# Altium PCB PCB1.pcbdoc (part 1 of 4)
Units mil, origin at the board's own origin, x right, y up, seen from the top; angles counter-clockwise.
Board outline 3346.69 x 4227.01 mil, 4 copper layers (Top Layer, Inner1, Inner2, Bottom Layer); 103 components, 144 nets, 660 pads, 262 vias.
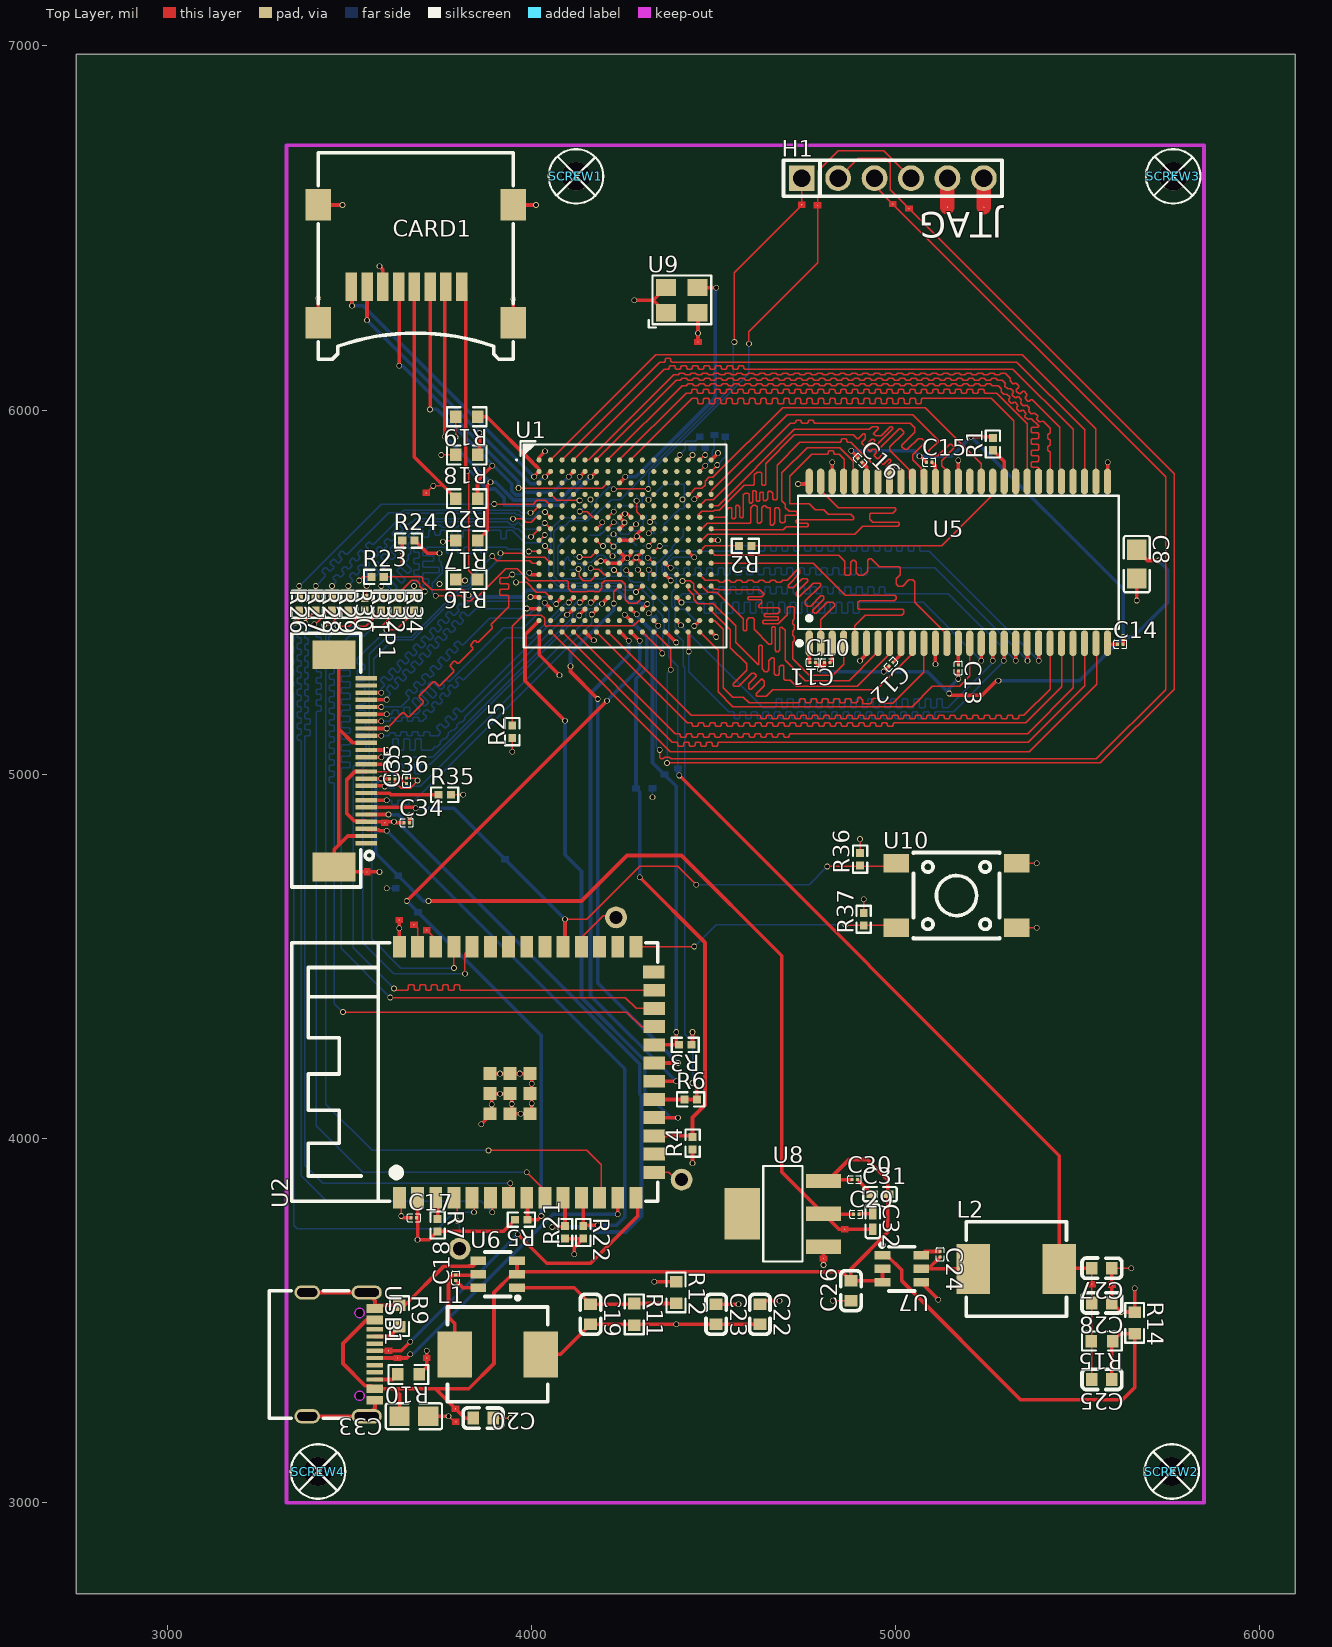
[diagram p0: Top Layer view]
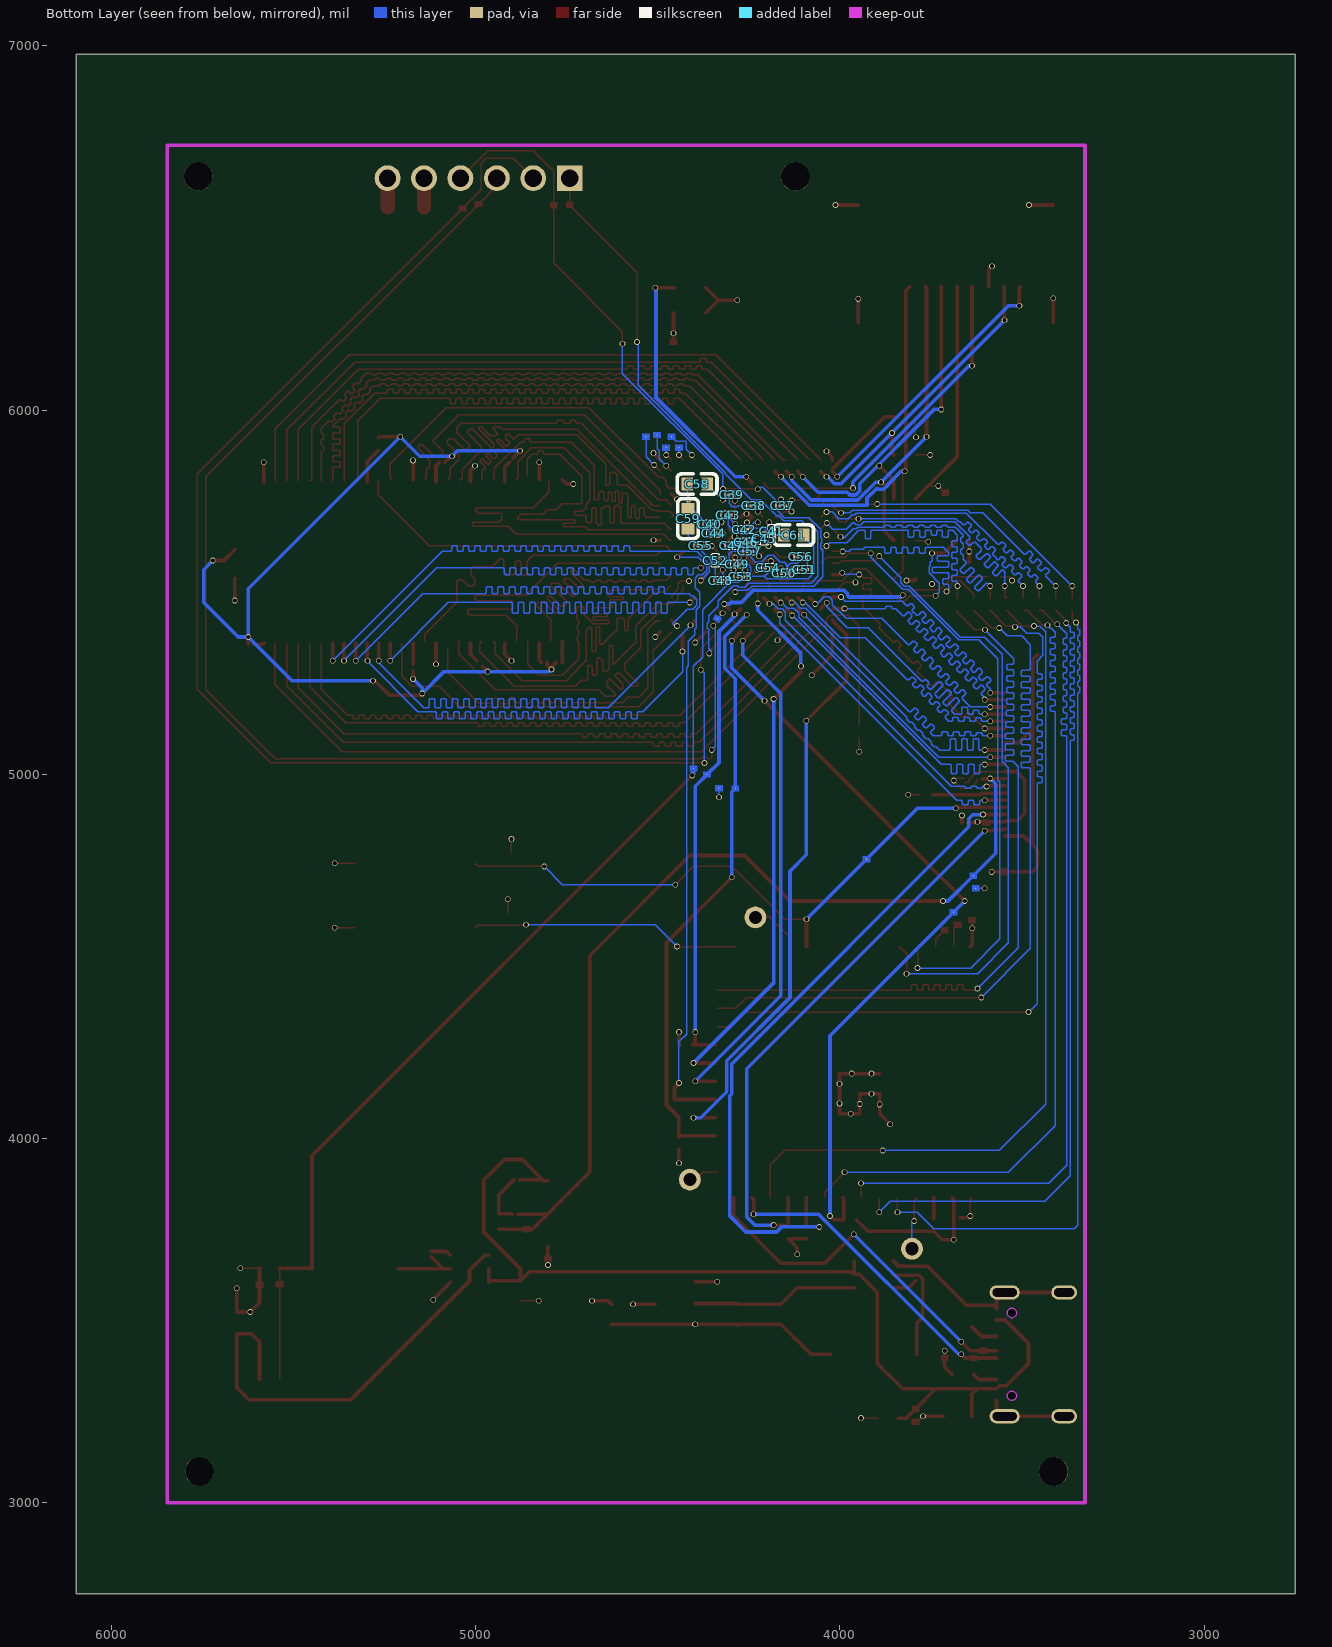
[diagram p1: Bottom Layer view, seen from below]
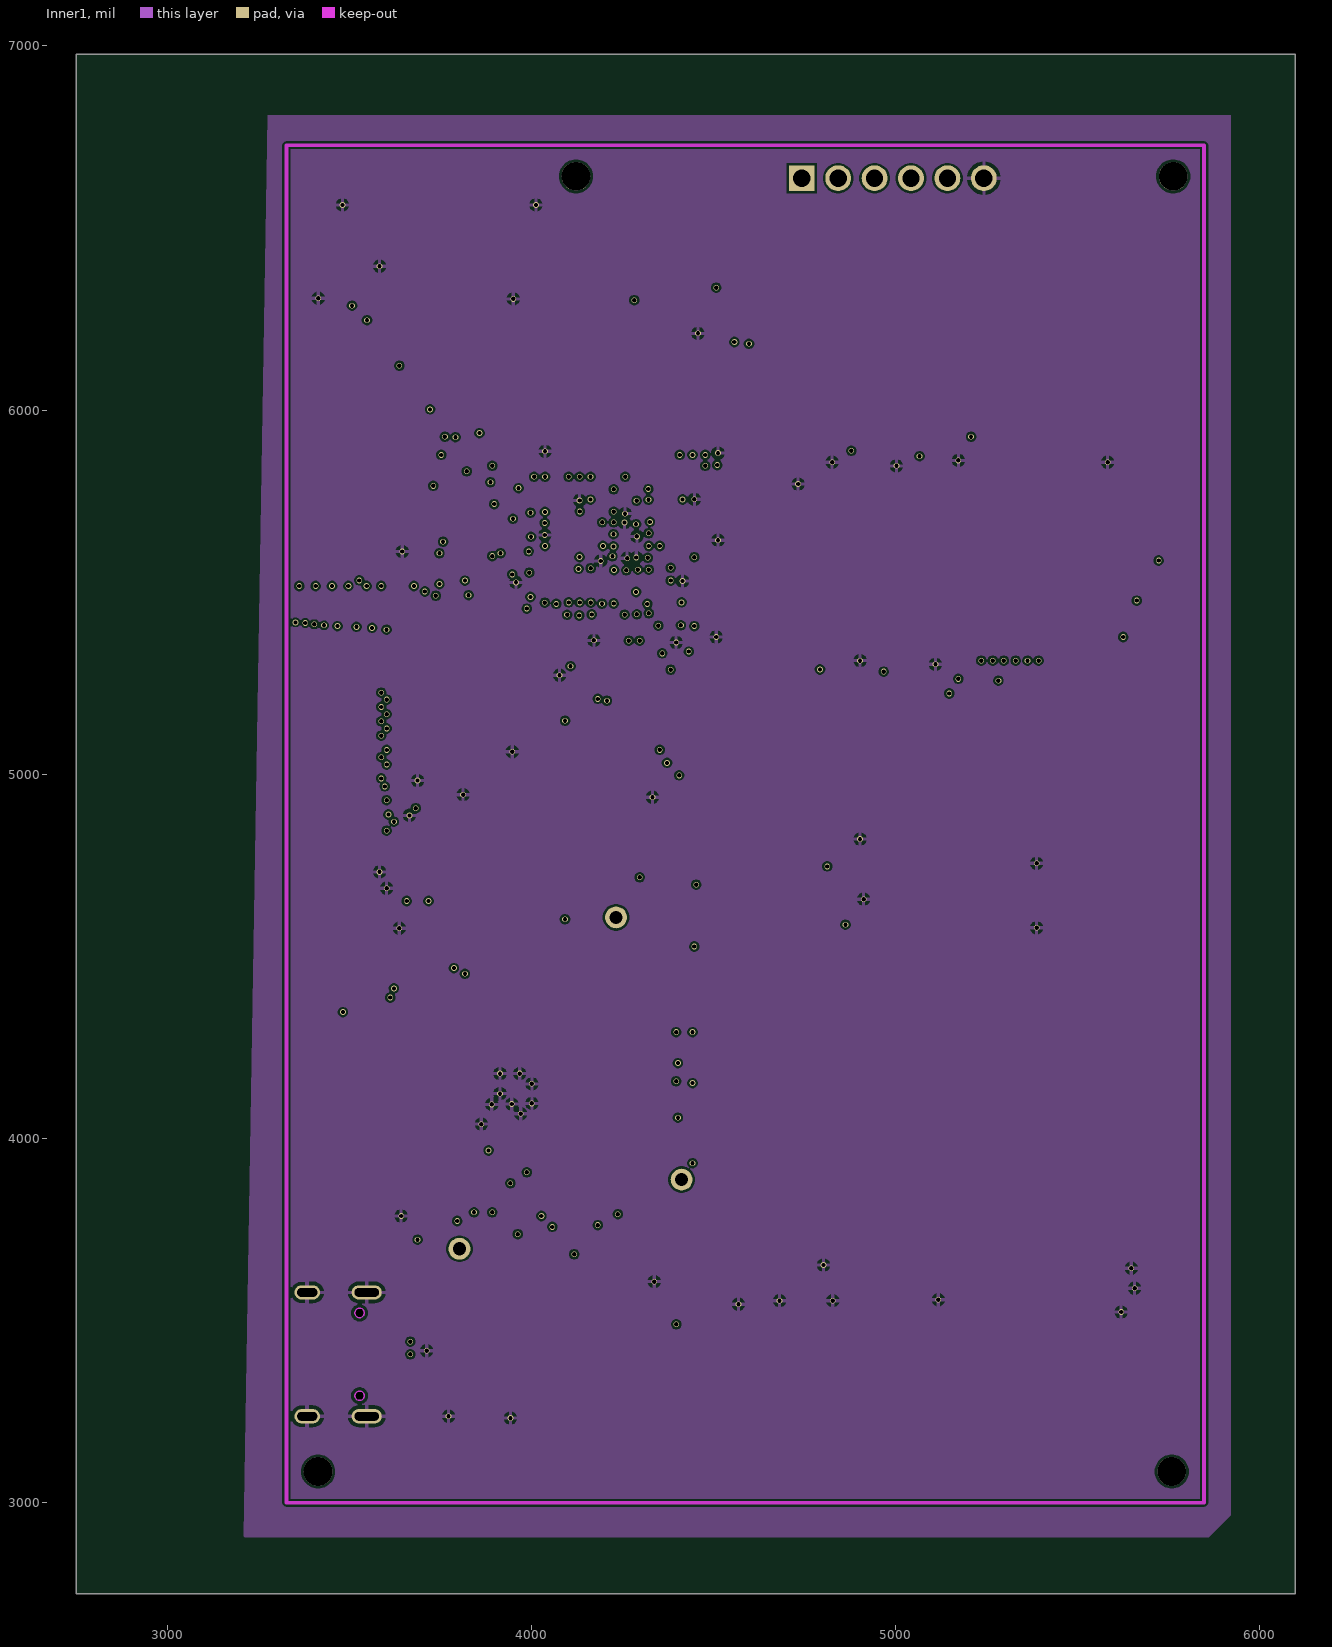
[diagram p2: Inner1]
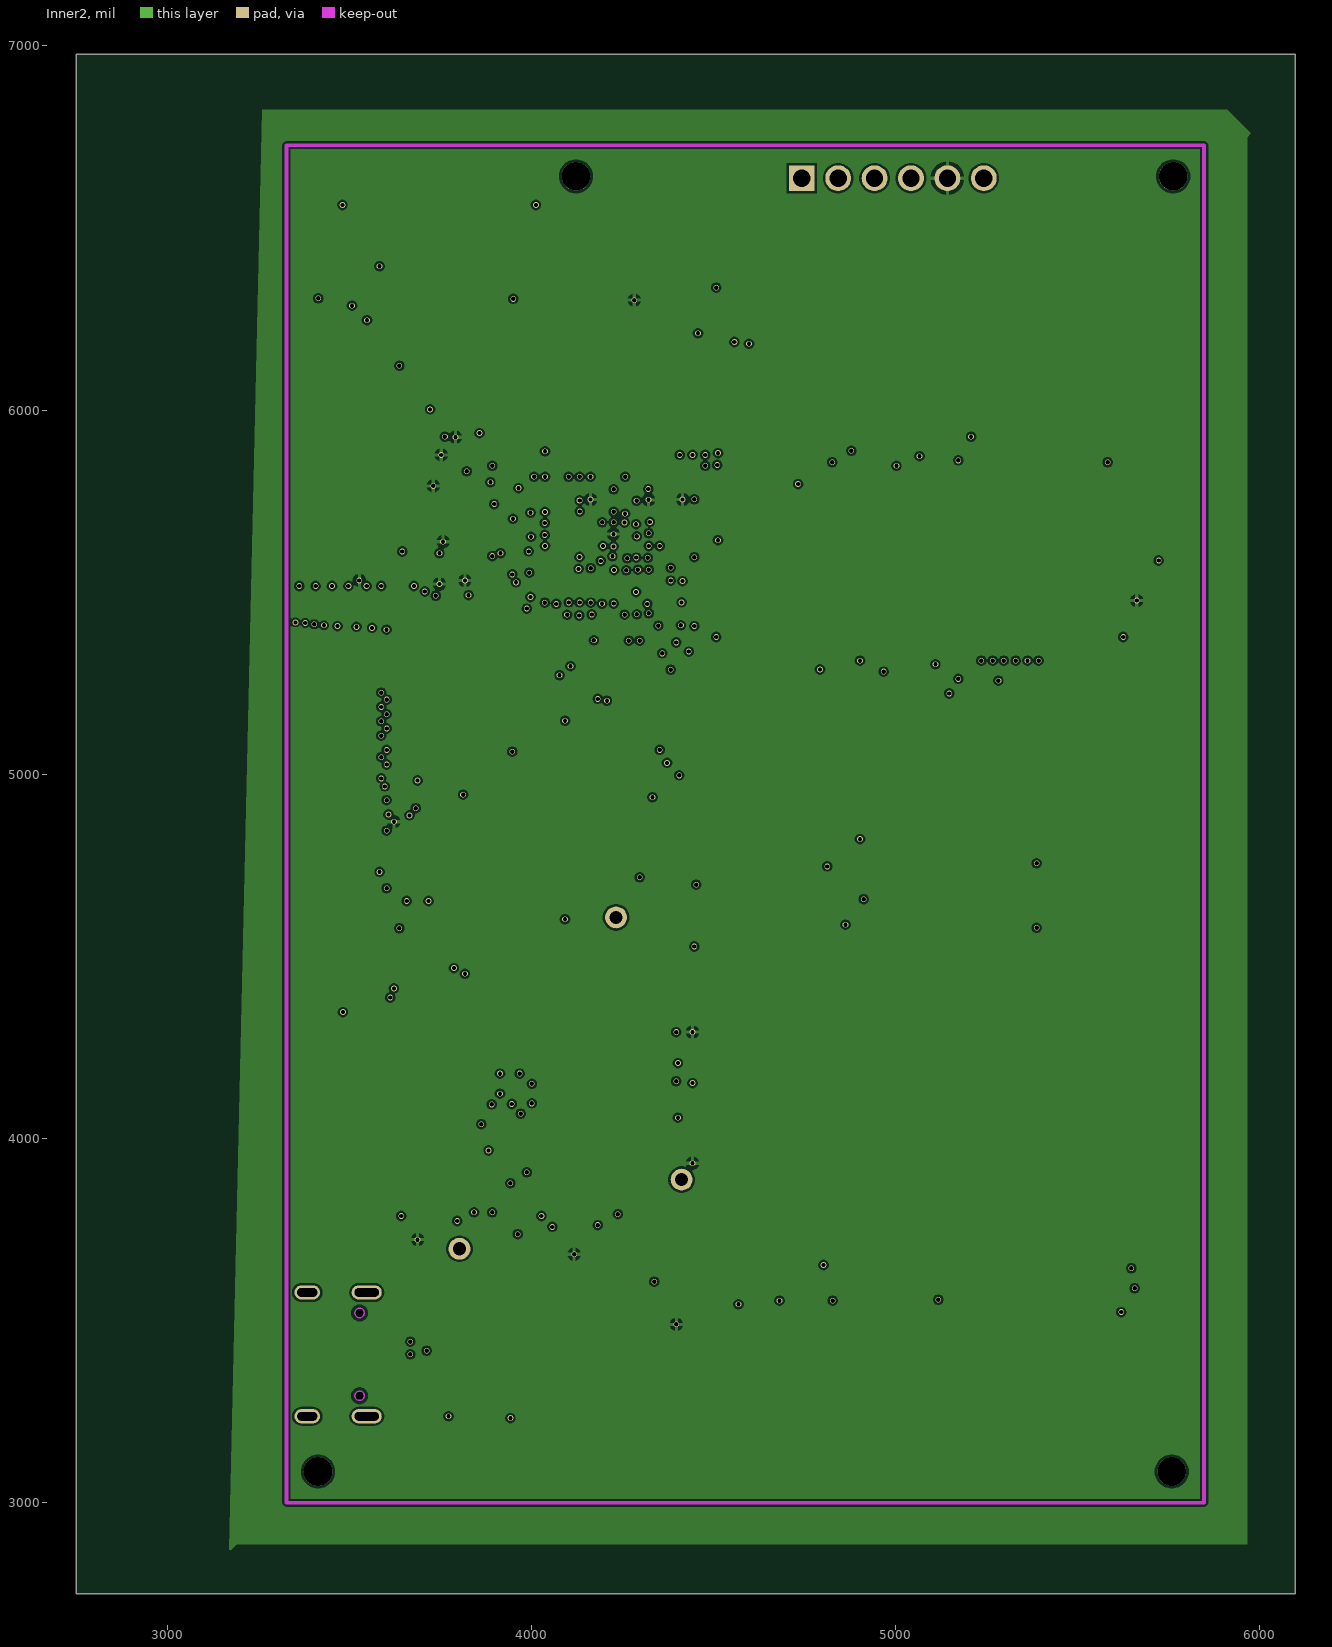
[diagram p3: Inner2]

## Layer stack, top to bottom
Top Solder Mask Layer: solder mask 0.4, Solder Resist, Dk 3.5
Top Layer: signal copper 1.4
Dielectric1: dielectric 12.6, FR-4, Dk 4.8
Inner1: signal copper 1.4
Dielectric5: dielectric 12.6, FR-4, Dk 4.8
Inner2: signal copper 1.4
Dielectric6: dielectric 12.6, FR-4, Dk 4.8
Bottom Layer: signal copper 1.4
Bottom Solder Mask Layer: solder mask 0.4, Solder Resist, Dk 3.5

## Board outline
6096.69,2750 2750,2750 2750,6977.01 6096.69,6977.01

## Design rules (kind name [scope] priority, off if disabled: settings)
BoardOutlineClearance copperThickness1oz_1 [All] p1: gap=10 ignorepadtopadclearanceinfootprint=FALSE except(0: Arc-SplitContinuation Track-SplitContinuation SMDPad-SplitContinuation THPad-SplitContinuation Via-SplitContinuation Fill-SplitContinuation Poly-SplitContinuation Region-SplitContinuation Text-SplitContinuation; 6: Track-CutoutEdge SMDPad-CutoutEdge THPad-CutoutEdge Via-CutoutEdge Region-CutoutEdge; 11.8: Track-OutlineEdge SMDPad-OutlineEdge THPad-OutlineEdge Via-OutlineEdge Fill-OutlineEdge Fill-CutoutEdge Poly-OutlineEdge Region-OutlineEdge Text-OutlineEdge)
BoardOutlineClearance copperThickness2oz_1 [All] p2: gap=10 ignorepadtopadclearanceinfootprint=FALSE except(0: Arc-SplitContinuation Track-SplitContinuation SMDPad-SplitContinuation THPad-SplitContinuation Via-SplitContinuation Fill-SplitContinuation Poly-SplitContinuation Region-SplitContinuation Text-SplitContinuation; 6: Track-CutoutEdge SMDPad-CutoutEdge THPad-CutoutEdge Via-CutoutEdge Region-CutoutEdge; 11.8: Track-OutlineEdge SMDPad-OutlineEdge THPad-OutlineEdge Via-OutlineEdge Fill-OutlineEdge Fill-CutoutEdge Poly-OutlineEdge Region-OutlineEdge Text-OutlineEdge)
Clearance copperThickness1oz [(InNet('SD_A0') OR InNet('SD_A1') OR InNet('SD_A2') OR InNet('SD_A3') OR InNet('SD_A4') OR InNet('SD_A5') OR InNet('SD_A6') OR InNet('SD_A7') OR InNet('SD_A8') OR InNet('SD_A9') OR InNet('SD_A10') OR InNet('SD_A11') OR InNet('SD_A12') OR InNet('SD_DQ15') OR InNet('SD_DQ14') OR InNet('SD_DQ8') OR InNet('SD_BA0') OR InNet('SD_BA1') OR InNet('SD_DQ9') OR InNet('SD_DQ7') OR InNet('SD_CLK') OR InNet('SD_WE_N') OR InNet('SD_DQ10') OR InNet('SD_CAS_N') OR InNet('SD_DQM1') OR InNet('SD_DQ2') OR InNet('SD_DQ3') OR InNet('SD_DQ11') OR InNet('SD_DQ12') OR InNet('SD_DQ13') OR InNet('SD_DQ0') OR InNet('SD_DQ1') OR InNet('SD_CS_N') OR InNet('SD_RAS_N') OR InNet('SD_DQ4') OR InNet('SD_DQ6') OR InNet('$1N9241') OR InNet('$1N9192') OR InNet('GND') OR InNet('$1N9142') OR InNet('SD_DQ5') OR InNet('$1N9091') OR InNet('SD_DQM0') OR InNet('$1N9039') OR InNet('$1N8986') OR InNet('$1N8318') OR InNet('$1N9437') OR InNet('$1N9341') OR InNet('+3V3') OR InNet('$1N11348') OR InNet('DOUT') OR InNet('DIN') OR InNet('CCLK') OR InNet('DONE') OR InNet('PROGRAMN') OR InNet('INITN') OR InNet('$1N11975') OR InNet('DN') OR InNet('DP') OR InNet('$1N14459') OR InNet('$1N14416') OR InNet('$1N14567') OR InNet('+5V') OR InNet('$1N16833') OR InNet('$1N16832') OR InNet('+1V1') OR InNet('$1N16834') OR InNet('+1V8') OR InNet('$1N17349') OR InNet('$1N12557') OR InNet('$1N12553') OR InNet('M_D2') OR InNet('M_D3') OR InNet('M_CMD') OR InNet('M_CLK') OR InNet('M_D0') OR InNet('M_D1') OR InNet('SDA') OR InNet('SCL') OR InNet('RESET') OR InNet('VSYNC') OR InNet('HREF') OR InNet('Y9') OR InNet('MCLK') OR InNet('Y8') OR InNet('Y7') OR InNet('PCLK') OR InNet('Y6') OR InNet('Y2') OR InNet('Y5') OR InNet('Y3') OR InNet('Y4') OR InNet('$1N24422') OR InNet('$1N24377') OR InNet('$1N24492') OR InNet('CRYSTAL') OR InNet('SSPI_CS_N') OR InNet('D0') OR InNet('D1') OR InNet('D2') OR InNet('D4') OR InNet('D3') OR InNet('D5') OR InNet('D6') OR InNet('D7') OR InNet('RX') OR InNet('TX') OR InNet('$1N29790') OR InNet('$1N29833') OR InNet('$1N29916') OR InNet('$1N29959') OR InNet('$1N30002') OR InNet('$1N30085') OR InNet('$1N30089') OR InNet('$1N30093') OR InNet('TDO') OR InNet('TDI') OR InNet('TMS') OR InNet('TCK') OR InNet('$1N33205') OR InNet('PROGRAM') OR InNet('$1N36431') OR InNet('$1N36646') OR InNet('$1N36895') OR InNet('$1N37600') OR InNet('$1N37295') OR InNet('$1N36495') OR InNet('$1N36690') OR InNet('$1N36953') OR InNet('$1N37637') OR InNet('$1N37245') OR InNet('$1N37470') OR InNet('$1N36752') OR InNet('$1N37409') OR InNet('$1N36552') OR InNet('$1N37361') OR InNet('$1N36571') OR InNet('$1N36807') OR InNet('$1N37097') OR InNet('$1N37518') OR InNet('$1N37345') OR InNet('$1N37150') OR InNet('$1N47813') OR InNet('$1N41066'))] p1: gap=6 ignorepadtopadclearanceinfootprint=FALSE except(3.9: Track-Track; 6.9: Track-Hole SMDPad-Hole THPad-Hole Via-Hole Fill-Hole Poly-Hole Region-Hole Text-Hole; 7: Arc-Arc Arc-Track Arc-SMDPad Arc-THPad Arc-Via Arc-Fill Arc-Poly Arc-Region Arc-Text Arc-Hole; 11.8: Track-Fill Fill-Region)
Clearance copperThickness2oz [All] p2: gap=6 ignorepadtopadclearanceinfootprint=FALSE except(6.9: Track-Hole SMDPad-Hole THPad-Hole Via-Hole Fill-Hole Poly-Hole Region-Hole Text-Hole; 7: Arc-Arc Arc-Track Arc-SMDPad Arc-THPad Arc-Via Arc-Fill Arc-Poly Arc-Region Arc-Text Arc-Hole; 8: Track-Track; 11.8: Track-Fill Fill-Region)
DiffPairsRouting differentialPair [All] p1: maxlimit=6 minlimit=6 mostfreqgap=6 toplayer_minwidth=5 toplayer_maxwidth=100 toplayer_prefwidth=10 midlayer1_minwidth=5 midlayer1_maxwidth=100 midlayer1_prefwidth=10 midlayer2_minwidth=5 midlayer2_maxwidth=100 midlayer2_prefwidth=10 bottomlayer_minwidth=5 bottomlayer_maxwidth=100 bottomlayer_prefwidth=10 maxuncoupledlength=10
PasteMaskExpansion pasteMaskExpansion [All] p1: expansion=0
PlaneConnect innerPlane [All] p1: planeconnectstyle=Relief reliefexpansion=20 reliefentries=4 reliefconductorwidth=10 reliefairgap=10
PolygonConnect copperRegion [All] p1: connectstyle=Relief reliefconductorwidth=10 reliefentries=4 polygonreliefangle="90 Angle" airgapwidth=10
RoutingVias viaSize [All] p1: holewidth=11.81 width=15.75 viastyle="Through Hole" minholewidth=11.81 minwidth=15.75 maxholewidth=248.03 maxwidth=393.7
SolderMaskExpansion solderMaskExpansion [All] p1: expansion=2 istentingtop=FALSE useseparateexpansions=TRUE expansionbottom=2 istentingbottom=FALSE
Width copperThickness1oz_2 [All] p1: maxlimit=100 minlimit=4 preferedwidth=4
Width copperThickness2oz_2 [All] p2: maxlimit=100 minlimit=8 preferedwidth=10
27 further rules are at their usual default settings.

## Components (designator, comment, footprint, x,y, rotation, side; value= is the part's Value field where it differs from the comment)
C8 "CL21A476MQYNNNE" C0805 5662.01,5577.01 r270 top
C10 "GRM022R60J104KE15D" C01005 4772.01,5307.01 r0 top
C11 "GRM022R60J104KE15D" C01005 4812.01,5307.01 r180 top
C12 "GRM022R60J104KE15D" C01005 4987.01,5302.01 r225 top
C13 "GRM022R60J104KE15D" C01005 5172.01,5292.01 r270 top
C14 "GRM022R60J104KE15D" C01005 5617.01,5357.01 r0 top
C15 "GRM022R60J104KE15D" C01005 5092.01,5857.01 r0 top
C16 "GRM022R60J104KE15D" C01005 4902.01,5862.01 r315 top
C17 "GRM022R60J104KE15D" C01005 3677.01,3782.01 r0 top
C18 "GRM022R60J104KE15D" C01005 3792.01,3617.01 r90 top
C19 "TCC0603X7R104K500CT" C0603 4162.01,3517.01 r270 top
C20 "TCC0603X5R226M6R3CT" C0603 3867.01,3232.01 r180 top
C22 "TCC0603X5R226M6R3CT" C0603 4627.01,3517.01 r270 top
C23 "TCC0603X5R226M6R3CT" C0603 4507.01,3517.01 r270 top
C24 "GRM022R60J104KE15D" C01005 5122.01,3682.01 r270 top
C25 "TCC0603X7R104K500CT" C0603 5566.19,3338.55 r180 top
C26 "TCC0603X5R226M6R3CT" C0603 4877.01,3582.01 r90 top
C27 "TCC0603X5R226M6R3CT" C0603 5566.19,3643.55 r180 top
C28 "TCC0603X5R226M6R3CT" C0603 5566.19,3548.55 r180 top
C29 "GRM022R60J104KE15D" C01005 4892.01,3792.01 r0 top
C30 "GRM022R60J104KE15D" C01005 4887.01,3887.01 r0 top
C31 "GRM155R60J106ME44D" C0402 4957.01,3847.01 r0 top
C32 "GRM155R60J106ME44D" C0402 4937.01,3772.01 r270 top
C33 "CL21A476MQYNNNE" C0805 3677.01,3237.01 r180 top
C34 "GRM022R60J104KE15D" C01005 3657.01,4867.01 r0 top
C35 "GRM022R60J104KE15D" C01005 3657.01,4982.01 r90 top
C36 "GRM022R60J104KE15D" C01005 3617.01,4987.01 r0 top
C37 "GRM022R60J104KE15D" C01005 4157.01,5737.01 r180 bottom
C38 "GRM022R60J104KE15D" C01005 4237.01,5737.01 r180 bottom
C39 "GRM022R60J104KE15D" C01005 4297.01,5767.01 r180 bottom
C40 "GRM022R60J104KE15D" C01005 4357.01,5687.01 r180 bottom
C41 "GRM022R60J104KE15D" C01005 4187.01,5667.01 r90 bottom
C42 "GRM022R60J104KE15D" C01005 4262.01,5672.01 r180 bottom
C43 "GRM022R60J104KE15D" C01005 4307.01,5712.01 r180 bottom
C44 "GRM022R60J104KE15D" C01005 4347.01,5662.01 r180 bottom
C45 "GRM022R60J104KE15D" C01005 4207.01,5647.01 r270 bottom
C46 "GRM022R60J104KE15D" C01005 4257.01,5637.01 r180 bottom
C47 "GRM022R60J104KE15D" C01005 4297.01,5627.01 r0 bottom
C48 "GRM022R60J104KE15D" C01005 4327.01,5532.01 r0 bottom
C49 "GRM022R60J104KE15D" C01005 4282.01,5577.01 r180 bottom
C50 "GRM022R60J104KE15D" C01005 4153.01,5552.01 r180 bottom
C51 "GRM022R60J104KE15D" C01005 4097.01,5562.01 r180 bottom
C52 "GRM022R60J104KE15D" C01005 4342.01,5587.01 r270 bottom
C53 "GRM022R60J104KE15D" C01005 4272.01,5542.01 r180 bottom
C54 "GRM022R60J104KE15D" C01005 4197.01,5567.01 r180 bottom
C55 "GRM022R60J104KE15D" C01005 4382.01,5627.01 r0 bottom
C56 "GRM022R60J104KE15D" C01005 4107.01,5597.01 r180 bottom
C57 "GRM022R60J104KE15D" C01005 4247.01,5612.01 r0 bottom
C58 "TCC0603X5R226M6R3CT" C0603 4392.01,5797.01 r180 bottom
C59 "TCC0603X5R226M6R3CT" C0603 4417.01,5702.01 r90 bottom
C61 "TCC0603X5R226M6R3CT" C0603 4127.01,5657.01 r180 bottom
CARD1 "DS1139-06-08SS4BSR" TF-SMD_DS1139-06-08SS4BSR 3682.01,6402.01 r0 top
H1 "2.54-1x6P直针" HDR-TH_6P-P2.54-V-M-1 4992.01,6637.01 r0 top
L1 "FXL0630-6R8-M" IND-SMD_L7.0-W6.6 3907.01,3407.01 r0 top
L2 "FXL0630-100-M" IND-SMD_L7.3-W6.8 5331.37,3641.78 r0 top
P1 "AFC07-S24FCC-00" FPC-SMD_AFC07-S24FCC-00 3502.01,5037.01 r270 top
R1 "0402WGF1002TCE" R0402 5267.01,5907.01 r90 top
R2 "0402WGF330JTCE" R0402 4587.01,5627.01 r180 top
R3 "0402WGF1002TCE" R0402 4422.01,4257.01 r180 top
R4 "0402WGF1002TCE" R0402 4442.01,3987.01 r90 top
R5 "0402WGF1002TCE" R0402 3972.01,3777.01 r180 top
R6 "0402WGF330JTCE" R0402 4437.01,4107.01 r0 top
R7 "0402WGF1002TCE" R0402 3742.01,3762.01 r270 top
R9 "0603WAF5101T5E" R0603 3637.01,3512.01 r270 top
R10 "0603WAF5101T5E" R0603 3662.01,3352.01 r180 top
R11 "FRC0603F1963TS" R0603 4282.01,3517.01 r270 top
R12 "FRC0603F6202TS" R0603 4397.01,3577.01 r270 top
R14 "FRC0603F6202TS" R0603 5656.19,3493.55 r270 top
R15 "0603WAF2322T5E" R0603 5566.19,3443.55 r180 top
R16 "FRC0603F6202TS" R0603 3821.85,5534.98 r180 top
R17 "FRC0603F6202TS" R0603 3822.01,5642.01 r180 top
R18 "FRC0603F6202TS" R0603 3822.01,5877.01 r180 top
R19 "FRC0603F6202TS" R0603 3822.01,5982.01 r180 top
R20 "FRC0603F6202TS" R0603 3822.01,5757.01 r180 top
R21 "0402WGF1002TCE" R0402 4092.01,3742.01 r270 top
R22 "0402WGF1002TCE" R0402 4142.01,3742.01 r270 top
R23 "0402WGF1002TCE" R0402 3577.01,5542.01 r0 top
R24 "0402WGF1002TCE" R0402 3662.01,5642.01 r0 top
R25 "0402WGF1002TCE" R0402 3947.01,5117.01 r90 top
R26 "0402WGF330JTCE" R0402 3362.01,5467.01 r270 top
R27 "0402WGF330JTCE" R0402 3407.01,5467.01 r270 top
R28 "0402WGF330JTCE" R0402 3452.01,5467.01 r270 top
R29 "0402WGF330JTCE" R0402 3497.01,5467.01 r270 top
R30 "0402WGF330JTCE" R0402 3542.01,5467.01 r270 top
R31 "0402WGF330JTCE" R0402 3587.01,5467.01 r270 top
R32 "0402WGF330JTCE" R0402 3632.01,5467.01 r270 top
R34 "0402WGF330JTCE" R0402 3677.01,5467.01 r270 top
R35 "0402WGF1002TCE" R0402 3761.46,4943.95 r0 top
R36 "0402WGF1002TCE" R0402 4902.01,4767.01 r90 top
R37 "0402WGF1002TCE" R0402 4912.01,4602.01 r90 top
SCREW1 "Screw-Hole-M2" Screw-Hole-M2 4122.01,6642.01 r0 top
SCREW2 "Screw-Hole-M2" Screw-Hole-M2 5758.09,3085.35 r0 top
SCREW3 "Screw-Hole-M2" Screw-Hole-M2 5762.01,6642.01 r0 top
SCREW4 "Screw-Hole-M2" Screw-Hole-M2 3413.66,3085.35 r0 top
U1 "LFE5U-25F-6BG256C" CABGA-256_L14.0-W14.0-R16-C16-P0.80-TL 4257.01,5627.01 r0 top
U2 "ESP32-S3-WROOM-1-N16R2" WIRELM-SMD_ESP32-S3-WROOM-1 3987.01,4182.01 r90 top
U5 "W9825G6KH-6" TSOP-54_L22.2-W10.2-P0.80-LS11.8-BL 5172.01,5582.01 r0 top
U6 "AP63200WU-7" SOT-23-6_L2.9-W1.6-P0.95-LS2.8-BR 3907.01,3627.01 r0 top
U7 "AP63200WU-7" SOT-23-6_L2.9-W1.6-P0.95-LS2.8-BR 5017.01,3642.01 r180 top
U8 "AMS1117-1.8_C6185" SOT-223-4_L6.5-W3.5-P2.30-LS7.0-BR 4690.15,3793.15 r0 top
U9 "XOS32024000LT00351005" OSC-SMD_4P-L3.2-W2.5-BL 4412.01,6302.01 r0 top
U10 "TPS645-5NC60" SW-SMD_4P-L6.0-W6.0-P4.50-LS9.2 5167.01,4667.01 r0 top
USB1 "TYPE-C16PIN" USB-C-SMD_TYPE-C16PIN 3477.01,3407.01 r270 top

## Footprints (in the part's own frame and the unit in brackets; to place one, negate y for a bottom-side part, rotate by r counter-clockwise, add the part's x,y. Pads: shape width x height; smd on the part's side, far side on the other; paste and mask are expansions set on the pad)
C0402 [mm]
  rect 0.79x0.54 smd paste-100 mask+0.051: 1(-0.545,0) 2(0.545,0)
  silkscreen extent -1.17,-0.5 1.17,0.5
C0603 [mm]
  rect 0.8x0.9 smd: 1(-0.7,0) 2(0.7,0)
  silkscreen extent -1.39,-0.71 1.39,0.71
C0805 [mm]
  rect 1.41x1.35 smd paste-100 mask+0.051: 1(-1,0) 2(1,0)
  silkscreen extent -1.96,-0.9 1.96,0.9
C01005 [mm]
  rect 0.21x0.22 smd: 1(-0.195,0) 2(0.195,0)
  silkscreen extent -0.46,-0.27 0.46,0.27
CABGA-256_L14.0-W14.0-R16-C16-P0.80-TL [mm]
  round 0.36 smd paste-100 mask+0.051: A1(-6,6) A2(-5.2,6) A3(-4.4,6) A4(-3.6,6) A5(-2.8,6) A6(-2,6) A7(-1.2,6) A8(-0.4,6) A9(0.4,6) A10(1.2,6) A11(2,6) A12(2.8,6) A13(3.6,6) A14(4.4,6) A15(5.2,6) A16(6,6) B1(-6,5.2) B2(-5.2,5.2) B3(-4.4,5.2) B4(-3.6,5.2) B5(-2.8,5.2) B6(-2,5.2) B7(-1.2,5.2) B8(-0.4,5.2) B9(0.4,5.2) B10(1.2,5.2) B11(2,5.2) B12(2.8,5.2) B13(3.6,5.2) B14(4.4,5.2) B15(5.2,5.2) B16(6,5.2) C1(-6,4.4) C2(-5.2,4.4) C3(-4.4,4.4) C4(-3.6,4.4) C5(-2.8,4.4) C6(-2,4.4) C7(-1.2,4.4) C8(-0.4,4.4) C9(0.4,4.4) C10(1.2,4.4) C11(2,4.4) C12(2.8,4.4) C13(3.6,4.4) C14(4.4,4.4) C15(5.2,4.4) C16(6,4.4) D1(-6,3.6) D2(-5.2,3.6) D3(-4.4,3.6) D4(-3.6,3.6) D5(-2.8,3.6) D6(-2,3.6) D7(-1.2,3.6) D8(-0.4,3.6) D9(0.4,3.6) D10(1.2,3.6) D11(2,3.6) D12(2.8,3.6) D13(3.6,3.6) D14(4.4,3.6) D15(5.2,3.6) D16(6,3.6) E1(-6,2.8) E2(-5.2,2.8) E3(-4.4,2.8) E4(-3.6,2.8) E5(-2.8,2.8) E6(-2,2.8) E7(-1.2,2.8) E8(-0.4,2.8) E9(0.4,2.8) E10(1.2,2.8) E11(2,2.8) E12(2.8,2.8) E13(3.6,2.8) E14(4.4,2.8) E15(5.2,2.8) E16(6,2.8) F1(-6,2) F2(-5.2,2) F3(-4.4,2) F4(-3.6,2) F5(-2.8,2) F6(-2,2) F7(-1.2,2) F8(-0.4,2) F9(0.4,2) F10(1.2,2) F11(2,2) F12(2.8,2) F13(3.6,2) F14(4.4,2) F15(5.2,2) F16(6,2) G1(-6,1.2) G2(-5.2,1.2) G3(-4.4,1.2) G4(-3.6,1.2) G5(-2.8,1.2) G6(-2,1.2) G7(-1.2,1.2) G8(-0.4,1.2) G9(0.4,1.2) G10(1.2,1.2) G11(2,1.2) G12(2.8,1.2) G13(3.6,1.2) G14(4.4,1.2) G15(5.2,1.2) G16(6,1.2) H1(-6,0.4) H2(-5.2,0.4) H3(-4.4,0.4) H4(-3.6,0.4) H5(-2.8,0.4) H6(-2,0.4) H7(-1.2,0.4) H8(-0.4,0.4) H9(0.4,0.4) H10(1.2,0.4) H11(2,0.4) H12(2.8,0.4) H13(3.6,0.4) H14(4.4,0.4) H15(5.2,0.4) H16(6,0.4) J1(-6,-0.4) J2(-5.2,-0.4) J3(-4.4,-0.4) J4(-3.6,-0.4) J5(-2.8,-0.4) J6(-2,-0.4) J7(-1.2,-0.4) J8(-0.4,-0.4) J9(0.4,-0.4) J10(1.2,-0.4) J11(2,-0.4) J12(2.8,-0.4) J13(3.6,-0.4) J14(4.4,-0.4) J15(5.2,-0.4) J16(6,-0.4) K1(-6,-1.2) K2(-5.2,-1.2) K3(-4.4,-1.2) K4(-3.6,-1.2) K5(-2.8,-1.2) K6(-2,-1.2) K7(-1.2,-1.2) K8(-0.4,-1.2) K9(0.4,-1.2) K10(1.2,-1.2) K11(2,-1.2) K12(2.8,-1.2) K13(3.6,-1.2) K14(4.4,-1.2) K15(5.2,-1.2) K16(6,-1.2) L1(-6,-2) L2(-5.2,-2) L3(-4.4,-2) L4(-3.6,-2) L5(-2.8,-2) L6(-2,-2) L7(-1.2,-2) L8(-0.4,-2) L9(0.4,-2) L10(1.2,-2) L11(2,-2) L12(2.8,-2) L13(3.6,-2) L14(4.4,-2) L15(5.2,-2) L16(6,-2) M1(-6,-2.8) M2(-5.2,-2.8) M3(-4.4,-2.8) M4(-3.6,-2.8) M5(-2.8,-2.8) M6(-2,-2.8) M7(-1.2,-2.8) M8(-0.4,-2.8) M9(0.4,-2.8) M10(1.2,-2.8) M11(2,-2.8) M12(2.8,-2.8) M13(3.6,-2.8) M14(4.4,-2.8) M15(5.2,-2.8) M16(6,-2.8) N1(-6,-3.6) N2(-5.2,-3.6) N3(-4.4,-3.6) N4(-3.6,-3.6) N5(-2.8,-3.6) N6(-2,-3.6) N7(-1.2,-3.6) N8(-0.4,-3.6) N9(0.4,-3.6) N10(1.2,-3.6) N11(2,-3.6) N12(2.8,-3.6) N13(3.6,-3.6) N14(4.4,-3.6) N15(5.2,-3.6) N16(6,-3.6) P1(-6,-4.4) P2(-5.2,-4.4) P3(-4.4,-4.4) P4(-3.6,-4.4) P5(-2.8,-4.4) P6(-2,-4.4) P7(-1.2,-4.4) P8(-0.4,-4.4) P9(0.4,-4.4) P10(1.2,-4.4) P11(2,-4.4) P12(2.8,-4.4) P13(3.6,-4.4) P14(4.4,-4.4) P15(5.2,-4.4) P16(6,-4.4) R1(-6,-5.2) R2(-5.2,-5.2) R3(-4.4,-5.2) R4(-3.6,-5.2) R5(-2.8,-5.2) R6(-2,-5.2) R7(-1.2,-5.2) R8(-0.4,-5.2) R9(0.4,-5.2) R10(1.2,-5.2) R11(2,-5.2) R12(2.8,-5.2) R13(3.6,-5.2) R14(4.4,-5.2) R15(5.2,-5.2) R16(6,-5.2) T1(-6,-6) T2(-5.2,-6) T3(-4.4,-6) T4(-3.6,-6) T5(-2.8,-6) T6(-2,-6) T7(-1.2,-6) T8(-0.4,-6) T9(0.4,-6) T10(1.2,-6) T11(2,-6) T12(2.8,-6) T13(3.6,-6) T14(4.4,-6) T15(5.2,-6) T16(6,-6)
  silkscreen extent -7.63,-7.08 7.08,7.3
FPC-SMD_AFC07-S24FCC-00 [mm]
  rect 0.3x1.5 smd: 1(5.745,1.129) 2(5.245,1.129) 3(4.746,1.129) 4(4.245,1.129) 5(3.746,1.129) 6(3.245,1.129) 7(2.746,1.129) 8(2.245,1.129) 9(1.746,1.129) 10(1.245,1.129) 11(0.746,1.129) 12(0.245,1.129) 13(-0.254,1.129) 14(-0.755,1.129) 15(-1.251,1.13) 16(-1.754,1.13) 17(-2.254,1.128) 18(-2.754,1.129) 19(-3.254,1.129) 20(-3.756,1.132) 21(-4.256,1.132) 22(-4.756,1.132) 23(-5.256,1.132) 24(-5.756,1.132)
  rect 2x3 smd: 25(-7.401,-1.132) 26(7.401,-1.125)
  silkscreen extent -8.89,-4.07 8.8,1.61
HDR-TH_6P-P2.54-V-M-1 [mm]
  rect 1.8x1.8 hole 1.2: 1(-6.35,0)
  round 1.8 hole 1.2: 2(-3.81,0) 3(-1.27,0) 4(1.27,0) 5(3.81,0) 6(6.35,0)
  silkscreen extent -7.62,-1.25 7.62,1.25
IND-SMD_L7.0-W6.6 [mm]
  rect 2.4x3.2 smd: 1(-3,0) 2(3,0)
  silkscreen extent -3.5,-3.3 3.5,3.3
IND-SMD_L7.3-W6.8 [mm]
  rect 2.35x3.5 smd: 1(-3,0) 2(3,0)
  silkscreen extent -3.5,-3.3 3.5,3.3
OSC-SMD_4P-L3.2-W2.5-BL [mm]
  rect 1.4x1.2 smd: 1(-1.1,-0.875) 2(1.1,-0.875) 3(1.1,0.875) 4(-1.1,0.875)
  silkscreen extent -2.29,-1.9 2.07,1.72
R0402 [mm]
  rect 0.566x0.54 smd paste-100 mask+0.051: 1(-0.433,0) 2(0.433,0)
  silkscreen extent -0.94,-0.5 0.94,0.5
R0603 [mil]
  rect 31.75x34.02 smd paste-3937.01 mask+2: 1(-29.66,0) 2(29.66,0)
  silkscreen extent -55,-26 55,26
Screw-Hole-M2 [mm]
  round 2 hole 2: 1(0,0)
  silkscreen extent -1.9,-1.9 1.9,1.9
SOT-23-6_L2.9-W1.6-P0.95-LS2.8-BR [mm]
  rect 1.1x0.6 smd paste+0 mask+0.051: 1(1.35,-0.95) 2(1.35,0) 3(1.35,0.95) 4(-1.35,0.95) 5(-1.35,0) 6(-1.35,-0.95)
  silkscreen extent -0.9,-1.78 1.52,1.55
SOT-223-4_L6.5-W3.5-P2.30-LS7.0-BR [mm]
  rect 2.47x0.98 smd: 1(2.835,-2.3) 2(2.835,0) 3(2.835,2.3)
  rect 2.47x3.6 smd: 4(-2.835,0)
  silkscreen extent -1.37,-3.33 1.37,3.33
SW-SMD_4P-L6.0-W6.0-P4.50-LS9.2 [mm]
  rect 1.8x1.3 smd: 1(-4.2,2.25) 2(4.2,2.25) 3(-4.2,-2.25) 4(4.2,-2.25)
  silkscreen extent -3,-3 3,3
TF-SMD_DS1139-06-08SS4BSR [mm]
  rect 0.8x2 smd: 1(3.2,-1.6) 2(2.1,-1.6) 3(1,-1.6) 4(-0.1,-1.6) 5(-1.2,-1.6) 6(-2.3,-1.6) 7(-3.4,-1.6) 8(-4.5,-1.6)
  rect 1.8x2.2 smd: 9(-6.8,4.1) 10(-6.8,-4.1) 11(6.8,-4.1) 12(6.8,4.1)
  silkscreen extent -6.8,-6.65 6.8,7.75
TSOP-54_L22.2-W10.2-P0.80-LS11.8-BL [mm]
  oval 0.5x1.8 smd: 1(-10.4,-5.642) 2(-9.6,-5.642) 3(-8.8,-5.642) 4(-8,-5.642) 5(-7.2,-5.642) 6(-6.4,-5.642) 7(-5.6,-5.642) 8(-4.8,-5.642) 9(-4,-5.642) 10(-3.2,-5.642) 11(-2.4,-5.642) 12(-1.6,-5.642) 13(-0.8,-5.642) 14(0,-5.642) 15(0.8,-5.642) 16(1.6,-5.642) 17(2.4,-5.642) 18(3.2,-5.642) 19(4,-5.642) 20(4.8,-5.642) 21(5.6,-5.642) 22(6.4,-5.642) 23(7.2,-5.642) 24(8,-5.642) 25(8.8,-5.642) 26(9.6,-5.642) 27(10.4,-5.642) 28(10.4,5.642) 29(9.6,5.642) 30(8.8,5.642) 31(8,5.642) 32(7.2,5.642) 33(6.4,5.642) 34(5.6,5.642) 35(4.8,5.642) 36(4,5.642) 37(3.2,5.642) 38(2.4,5.642) 39(1.6,5.642) 40(0.8,5.642) 41(0,5.642) 42(-0.8,5.642) 43(-1.6,5.642) 44(-2.4,5.642) 45(-3.2,5.642) 46(-4,5.642) 47(-4.8,5.642) 48(-5.6,5.642) 49(-6.4,5.642) 50(-7.2,5.642) 51(-8,5.642) 52(-8.8,5.642) 53(-9.6,5.642) 54(-10.4,5.642)
  silkscreen extent -11.23,-5.79 11.19,4.65
USB-C-SMD_TYPE-C16PIN [mm]
  oval 1x2.1 hole 0.6 slot 1.7 at 90 deg: 1(-4.32,1.787) 2(4.32,1.787)
  oval 1x1.8 hole 0.6 slot 1.4 at 90 deg: 3(-4.32,-2.362) 4(4.32,-2.362)
  rect 0.6x1.15 smd paste-100 mask+0.051: A1B12(-3.2,2.362) A4B9(-2.4,2.362) B1A12(3.2,2.362) B4A9(2.4,2.362)
  rect 0.3x1.15 smd paste-100 mask+0.051: A5(-1.25,2.362) A6(-0.25,2.362) A7(0.25,2.362) A8(1.25,2.362) B5(1.75,2.362) B6(0.75,2.362) B7(-0.75,2.362) B8(-1.75,2.362)
  Board Outline Layer board cut-out: 2.89,1.613 2.955,1.613 3.074,1.564 3.166,1.472 3.215,1.353 3.215,1.223 3.166,1.104 3.074,1.013 2.955,0.963 2.89,0.963 2.825,0.963 2.706,1.013 2.614,1.104 2.565,1.223 2.565,1.353 2.614,1.472 2.706,1.564 2.825,1.613 2.89,1.613
  Board Outline Layer board cut-out: -2.89,1.613 -2.825,1.613 -2.706,1.564 -2.614,1.472 -2.565,1.353 -2.565,1.223 -2.614,1.104 -2.706,1.013 -2.825,0.963 -2.89,0.963 -2.955,0.963 -3.074,1.013 -3.166,1.104 -3.215,1.223 -3.215,1.353 -3.166,1.472 -3.074,1.564 -2.955,1.613 -2.89,1.613
  Board Outline Layer circle w0.005: c2.89,1.288 r0.325
  Board Outline Layer circle w0.005: c-2.89,1.288 r0.325
  Board Outline Layer region: 2.89,1.613 2.955,1.613 3.074,1.564 3.166,1.472 3.215,1.353 3.215,1.223 3.166,1.104 3.074,1.013 2.955,0.963 2.89,0.963 2.825,0.963 2.706,1.013 2.614,1.104 2.565,1.223 2.565,1.353 2.614,1.472 2.706,1.564 2.825,1.613 2.89,1.613
  Board Outline Layer region: -2.89,1.613 -2.825,1.613 -2.706,1.564 -2.614,1.472 -2.565,1.353 -2.565,1.223 -2.614,1.104 -2.706,1.013 -2.825,0.963 -2.89,0.963 -2.955,0.963 -3.074,1.013 -3.166,1.104 -3.215,1.223 -3.215,1.353 -3.166,1.472 -3.074,1.564 -2.955,1.613 -2.89,1.613
  silkscreen extent -4.45,-5 4.45,0.52
WIRELM-SMD_ESP32-S3-WROOM-1 [mm]
  rect 1.5x0.9 smd paste+0 mask+0.05: 1(-8.75,8.895) 2(-8.75,7.625) 3(-8.75,6.355) 4(-8.75,5.085) 5(-8.75,3.815) 6(-8.75,2.545) 7(-8.75,1.275) 8(-8.75,0.005) 9(-8.75,-1.265) 10(-8.75,-2.535) 11(-8.75,-3.805) 12(-8.75,-5.075) 13(-8.75,-6.345) 14(-8.75,-7.615) 27(8.75,-7.615) 28(8.75,-6.345) 29(8.75,-5.075) 30(8.75,-3.805) 31(8.75,-2.535) 32(8.75,-1.265) 33(8.75,0.005) 34(8.75,1.275) 35(8.75,2.545) 36(8.75,3.815) 37(8.75,5.085) 38(8.75,6.355) 39(8.75,7.625) 40(8.75,8.895)
  rect 0.9x1.5 smd paste+0 mask+0.05: 15(-6.985,-8.895) 16(-5.715,-8.895) 17(-4.445,-8.895) 18(-3.175,-8.895) 19(-1.905,-8.895) 20(-0.635,-8.895) 21(0.635,-8.895) 22(1.905,-8.895) 23(3.175,-8.895) 24(4.445,-8.895) 25(5.715,-8.895) 26(6.985,-8.865)
  rect 0.9x0.9 smd: 41(-2.9,-0.225) 41(-2.9,1.175) 41(-2.9,2.575) 41(-1.5,2.575) 41(-1.5,-0.225) 41(-1.5,1.175) 41(-0.1,2.575) 41(-0.1,1.175) 41(-0.1,-0.225)
  silkscreen extent -9,-9.14 9.02,16.39

## Free pads (board coordinates)
  round 60 hole 36: 1(3802.01,3697.01) 1(4232.01,4607.01) 1(4412.01,3887.01)
  round 3.16 smd: 55(3548.45,4732.01) 55(3597.01,4867.01) 55(3607.01,3417.01) 55(3632.01,3397.01) 55(3636.81,4599.69) 55(3677.01,4587.01) 55(3710.8,5772.84) 55(3712.01,3397.01) 55(3712.01,4572.01) 55(3791.26,3257.75) 55(3792.01,3222.01) 55(4457.01,6187.01) 55(4741.91,6564.11) 55(4785.39,6562.47) 55(4801.76,3670.62) 55(4860.06,3750.55) 55(4991.99,6565.97) 55(5036.18,6553.98) 55(5142.01,6557.01) 55(5242.01,6557.01) 55(5538.63,3599.7) 55(5593.75,3598.16)
  round 3.16 smd far side: 55(3627.01,4687.01) 55(3633.63,4721.24) 55(3687.91,4621.1) 55(3927.13,4766.69) 55(4287.01,4961.17) 55(4332.01,4962.01) 55(4337.01,5427.01) 55(4364.77,4999.24) 55(4402.01,5016.04) 55(4442.01,5897.01) 55(4462.01,5927.01) 55(4477.01,5897.01) 55(4502.01,5932.01) 55(4532.01,5927.01)

## Via types
v1: diameter 15.75, hole 11.81, Top Layer to Bottom Layer, 262 vias

## Nets (pads, with @x,y where several pads share a name; then routed paths per layer and width w, separated by ;. In a path a pad name is that pad's centre, name@x,y a point inside that pad or via, vN(x,y) a via of type N, cw(c..) or ccw(c..) an arc to the next point about the centre after c; other vN are vias at no path point)
$1N8318: C15.2 U5.43 | length 56.7
  Top Layer w10: C15.2@5099.69,5857.01 5109.02,5847.68 U5.43@5109.02,5804.14
$1N8986: C16.2 U5.49 | length 57.7
  Top Layer w10: C16.2@4907.44,5856.58 4920.04,5843.98 U5.49@4920.04,5804.14
$1N9039: C14.1 U5.27 | length 29.1
  Top Layer w10: U5.27@5581.46,5359.88 5584.33,5357.01 C14.1@5609.33,5357.01
$1N9091: C13.1 U5.14 | length 57.9
  Top Layer w10: C13.1@5172.01,5302.01 U5.14@5172.01,5359.88
$1N9142: C12.1 U5.9 | length 55.1
  Top Layer w10: 4997.01,5312.01 5014.53,5329.53 U5.9@5014.53,5359.88
$1N9192: C11.1 U5.3 | length 55.3
  Top Layer w10: C11.1@4819.69,5307.01 4825.55,5312.87 U5.3@4825.55,5359.88
$1N9241: C10.1 U5.1 | length 57.9
  Top Layer w10: C10.1@4762.56,5307.01 U5.1@4762.56,5364.88
$1N9341: C8.1 C10.2 C11.2 C12.2 C13.2 C14.2 C15.1 C16.1 R1.2 | length 2644.7
  Top Layer w10: C10.2@4779.69,5307.01 4792.01,5294.69 v1(4792.01,5287.83) 4804.33,5300.15 C11.2@4804.33,5307.01 ; v1(4878.2,5888.2) 4896.58,5869.82 C16.1@4896.58,5867.44 ; v1(4967.01,5282.01) C12.2@4981.58,5296.58 ; v1(5065.44,5873.58) 5067.76,5873.58 C15.1@5084.33,5857.01 ; v1(5147.01,5222.01) 5152.01,5217.01 5237.01,5217.01 5277.01,5257.01 v1(5282.01,5257.01) ; v1(5172.01,5262.01) C13.2@5172.01,5284.33 ; v1(5207.01,5927.01) 5264.05,5927.01 R1.2@5267.01,5924.05 ; C14.2@5624.69,5357.01 v1(5624.69,5377.01) ; C8.1@5662.01,5616.38 5691.38,5587.01 v1(5722.01,5587.01)
  Bottom Layer w10: v1(4792.01,5287.83) 4797.83,5282.01 v1(4967.01,5282.01) 5087.01,5282.01 v1(5147.01,5222.01) 5147.01,5237.01 v1(5172.01,5262.01) ; v1(4878.2,5888.2) 5050.82,5888.2 v1(5065.44,5873.58) 5153.58,5873.58 v1(5207.01,5927.01) 5624.69,5509.33 v1(5624.69,5377.01) ; v1(5282.01,5257.01) 5504.69,5257.01 v1(5624.69,5377.01) ; v1(5722.01,5587.01) 5747.01,5562.01 5747.01,5472.01 5652.01,5377.01 v1(5624.69,5377.01)
$1N9437: R1.1 U5.37 | length 98.7
  Top Layer w10: R1.1@5267.01,5889.97 5297.99,5858.99 U5.37@5297.99,5804.14
$1N11348: R2.1 U5.38 | length 758.3
  Top Layer w3.94: R2.1@4604.05,5627.01 5127.01,5627.01 5267.01,5767.01 5267.01,5803.63 U5.38@5266.5,5804.14
$1N11975: R7.1 U2.3 | length 58.6
  Top Layer w10: U2.3@3741.81,3837.52 3742.01,3837.32 R7.1@3742.01,3779.05
$1N12553: R10.2 USB1.B5 | length 68.1
  Top Layer w10: USB1.B5@3570.02,3338.11 3618.45,3338.11 R10.2@3632.35,3352.01
$1N12557: R9.2 USB1.A5 | length 77.8
  Top Layer w10: USB1.A5@3570.02,3456.22 3610.88,3456.22 R9.2@3637.01,3482.35
$1N14416: C18.2 L1.1 U6.5 | length 300.8
  Top Layer w10: L1.1@3788.9,3407.01 3788.9,3492.01 3772.01,3508.9 3772.01,3613.33 3783.13,3624.45 3791.77,3624.45 C18.2@3792.01,3624.69 3851.54,3624.69 U6.5@3853.86,3627.01
$1N14459: C18.1 U6.6 | length 70
  Top Layer w10: C18.1@3792.01,3609.33 3811.73,3589.61 U6.6@3853.86,3589.61
$1N14567: C19.1 R11.1 R12.2 U6.1 | length 456.7
  Top Layer w10: U6.1@3960.16,3589.61 4116.97,3589.61 C19.1@4162.01,3544.57 4279.91,3544.57 R11.1@4282.01,3546.67 4396.33,3546.67 R12.2@4397.01,3547.35
$1N16832: C24.2 L2.1 U7.5 | length 208.4
  Top Layer w10: C24.2@5122.01,3674.33 5089.69,3642.01 U7.5@5070.16,3642.01 5070.38,3641.78 L2.1@5213.26,3641.78
$1N16833: C24.1 U7.6 | length 56.1
  Top Layer w10: U7.6@5070.16,3679.41 5080.2,3689.45 5121.77,3689.45 C24.1@5122.01,3689.69
$1N16834: C25.1 R14.2 R15.1 U7.1 | length 1210.5
  Top Layer w10: U7.1@4963.86,3679.41 4975.46,3679.41 5017.01,3637.86 5017.01,3608.76 5343.76,3282.01 5622.01,3282.01 5656.19,3316.19 R14.2@5656.19,3463.89 5616.19,3463.89 R15.1@5595.85,3443.55 5593.75,3441.45 C25.1@5593.75,3338.55
$1N17349: C29.2 C30.2 C31.1 C32.1 | length 149
  Top Layer w10: C30.2@4894.69,3887.01 4937.01,3844.69 C32.1@4937.01,3793.47 4901.15,3793.47 C29.2@4899.69,3792.01
$1N24377: R23.2 U1.P10 | length 796.1
  Top Layer w3.94: R23.2@3594.05,5542.01 3697.01,5542.01 3701.18,5537.83 3701.18,5530.45 3725.45,5506.18 3812.83,5506.18 v1(3827.01,5492.01)
  Top Layer w10: U1.P10@4304.25,5453.78 4317.01,5466.54 v1@4317.01,5467.01
  Bottom Layer w10: v1(3827.01,5492.01) 3832.24,5486.77 3975.1,5486.77 3978.15,5489.82 3978.15,5494.82 3989.2,5505.87 4236.97,5505.87 4271.05,5471.79 4298.9,5471.79 4302.84,5467.84 v1(4317.84,5467.84)
$1N24422: R24.2 U1.N10 | length 941.9
  Top Layer w3.94: v1(3737.01,5490.35) 3806.28,5490.35 3820.45,5476.18 3833.56,5476.18 3847.74,5490.35 3855.35,5490.35 3904.34,5539.34 3904.34,5539.54 3929.36,5564.57 3960.58,5564.57 3993.34,5531.81 4096.61,5531.81 4100.24,5528.18 4100.24,5510.54 4109.05,5501.73 4153,5501.73 4153.28,5502.01 4171.76,5502.01 4172.04,5501.73 4184.5,5501.73 4193.31,5510.54 4193.31,5524.65 4200.46,5531.81 4247.49,5531.81 4257.72,5521.58 4257.72,5479.05 4266.53,5470.24 4289.21,5470.24 U1.N10@4304.25,5485.28
  Top Layer w10: R24.2@3679.05,5642.01 3714.05,5607.01 v1(3747.01,5607.01)
  Bottom Layer w3.94: v1(3737.01,5490.35) 3727.01,5500.35 3727.01,5524.94 3754.88,5552.82 3754.88,5569.52 3752.01,5572.4 3752.01,5582.01 3747.01,5587.01 v1(3747.01,5607.01)
$1N24492: R25.2 U1.R10 | length 672.9
  Top Layer w3.94: R25.2@3947.01,5134.05 3947.01,5407.01 3977.01,5437.01 4014.24,5437.01 4014.56,5437.33 4027.02,5437.33 4035.83,5428.52 4035.83,5409.25 4038.07,5407.01 4042.01,5407.01 4042.25,5407.25 4278.99,5407.25 4294.03,5422.29 U1.R10@4304.25,5422.29
$1N29790: R26.2 U2.5 | length 2277.7
  Top Layer w3.94: v1(3351.69,5417.01) 3362.01,5427.32 R26.2@3362.01,5449.97 ; U2.5@3841.81,3837.52 3842.01,3837.32 v1(3842.01,3797.01)
  Bottom Layer w3.94: v1(3351.69,5417.01) 3347.01,5412.32 3347.01,5400.02 3341.94,5394.95 3341.94,5384.27 3347.01,5379.2 3347.01,5368.52 3341.94,5363.45 3341.94,5352.77 3347.01,5347.7 3347.01,5337.02 3341.94,5331.96 3341.94,5321.28 3347.01,5316.21 3347.01,5305.53 3341.94,5300.46 3341.94,5289.78 3347.01,5284.71 3347.01,5274.03 3341.94,5268.96 3341.94,5258.28 3347.01,5253.22 3347.01,5242.54 3341.94,5237.47 3341.94,5226.79 3347.01,5221.72 3347.01,3762.01 3357.01,3752.01 3741.97,3752.01 3786.97,3797.01 v1(3842.01,3797.01)
$1N29833: R27.2 U2.6 | length 2330.5
  Top Layer w3.94: v1(3378.43,5415.59) 3378.43,5421.39 R27.2@3407.01,5449.97 ; v1(3891.81,3797.01) U2.6@3891.81,3837.52
  Bottom Layer w3.94: v1(3378.43,5415.59) 3367.01,5404.17 3367.01,5393.5 3364.22,5390.72 3358.82,5390.72 3356.03,5387.94 3356.03,5377.76 3358.82,5374.97 3364.22,5374.97 3367.01,5372.19 3367.01,5362.01 3364.22,5359.22 3358.82,5359.22 3356.03,5356.44 3356.03,5346.26 3358.82,5343.48 3364.22,5343.48 3367.01,5340.69 3367.01,5330.51 3364.22,5327.73 3358.82,5327.73 3356.03,5324.94 3356.03,5314.76 3358.82,5311.98 3364.22,5311.98 3367.01,5309.2 3367.01,5299.02 3364.22,5296.23 3358.82,5296.23 3356.03,5293.45 3356.03,5283.27 3358.82,5280.48 3364.22,5280.48 3367.01,5277.7 3367.01,5267.52 3364.22,5264.74 3358.82,5264.74 3356.03,5261.95 3356.03,5251.77 3358.82,5248.99 3364.22,5248.99 3367.01,5246.2 3367.01,5236.02 3364.22,5233.24 3358.82,5233.24 3356.03,5230.46 3356.03,5220.28 3358.82,5217.49 3364.22,5217.49 3367.01,5214.71 3367.01,5204.53 3364.22,5201.74 3358.82,5201.74 3356.03,5198.96 3356.03,5188.78 3358.82,5186 3364.22,5186 3367.01,5183.21 3367.01,5174.45 3364.22,5171.67 3358.82,5171.67 3356.03,5168.89 3356.03,5158.71 3358.82,5155.92 3364.22,5155.92 3367.01,5153.14 3367.01,5142.96 3364.22,5140.17 3358.82,5140.17 3356.03,5137.39 3356.03,5127.21 3358.82,5124.43 3364.22,5124.43 3367.01,5121.64 3367.01,5111.46 3364.22,5108.68 3358.82,5108.68 3356.03,5105.89 3356.03,5095.71 3358.82,5092.93 3364.22,5092.93 3367.01,5090.15 3367.01,3897.01 3437.01,3827.01 3861.81,3827.01 v1(3891.81,3797.01)
$1N29916: R29.2 U2.9 | length 2325.6
  Top Layer w3.94: v1(3430.06,5408.96) 3444.01,5408.96 3485.02,5449.97 R29.2@3497.01,5449.97 ; v1(3987.01,3907.01) 4041.81,3852.2 U2.9@4041.81,3837.52
  Bottom Layer w3.94: v1(3430.06,5408.96) 3422.11,5401.01 3419.87,5401.01 3409.13,5390.27 3409.13,5378.6 3411.92,5375.81 3419.22,5375.81 3422.01,5373.03 3422.01,5362.85 3419.22,5360.06 3411.92,5360.06 3409.13,5357.28 3409.13,5347.1 3411.92,5344.32 3419.22,5344.32 3422.01,5341.53 3422.01,5331.35 3419.22,5328.57 3411.92,5328.57 3409.13,5325.78 3409.13,5315.6 3411.92,5312.82 3419.22,5312.82 3422.01,5310.04 3422.01,5299.86 3419.22,5297.07 3411.92,5297.07 3409.13,5294.29 3409.13,5284.11 3411.92,5281.32 3419.22,5281.32 3422.01,5278.54 3422.01,5268.36 3419.22,5265.58 3411.92,5265.58 3409.13,5262.79 3409.13,5252.61 3411.92,5249.83 3419.22,5249.83 3422.01,5247.04 3422.01,5236.86 3419.22,5234.08 3411.92,5234.08 3409.13,5231.3 3409.13,5222.89 3411.92,5220.11 3419.22,5220.11 3422.01,5217.33 3422.01,5207.15 3419.22,5204.36 3411.92,5204.36 3409.13,5201.58 3409.13,5191.4 3411.92,5188.61 3419.22,5188.61 3422.01,5185.83 3422.01,5175.65 3419.22,5172.87 3411.92,5172.87 3409.13,5170.08 3409.13,4034.88 3537.01,3907.01 v1(3987.01,3907.01)
$1N29959: R30.2 U2.12 | length 2344.4
  Top Layer w3.94: v1(3467.01,5407.01) 3499.05,5407.01 R30.2@3542.01,5449.97 ; v1(3882.01,3967.01) 4152.01,3967.01 4191.81,3927.2 U2.12@4191.81,3837.52
  Bottom Layer w3.94: v1(3467.01,5407.01) 3450.49,5407.01 3436.61,5393.13 3436.61,5392.75 3434.88,5391.02 3434.88,4094.13 3562.01,3967.01 v1(3882.01,3967.01)
$1N30002: R31.2 U2.23 | length 2320.7
  Top Layer w3.94: v1(3482.01,4347.01) 4262.01,4347.01 4302.01,4307.01 U2.23@4337.2,4307.01 ; v1@3517.01,5407.01 3544.05,5407.01 R31.2@3587.01,5449.97
  Bottom Layer w3.94: v1(3482.01,4347.01) 3458.52,4370.49 3458.52,4974.33 3455.74,4977.11 3446.69,4977.11 3443.91,4979.9 3443.91,4990.08 3446.69,4992.86 3455.74,4992.86 3458.52,4995.65 3458.52,5005.83 3455.74,5008.61 3446.69,5008.61 3443.91,5011.39 3443.91,5021.57 3446.69,5024.36 3455.74,5024.36 3458.52,5027.14 3458.52,5037.32 3455.74,5040.11 3446.69,5040.11 3443.91,5042.89 3443.91,5053.07 3446.69,5055.85 3455.74,5055.85 3458.52,5058.64 3458.52,5068.82 3455.74,5071.6 3446.69,5071.6 3443.91,5074.39 3443.91,5084.57 3446.69,5087.35 3455.74,5087.35 3458.52,5090.13 3458.52,5100.31 3455.74,5103.1 3446.69,5103.1 3443.91,5105.88 3443.91,5116.06 3446.69,5118.85 3455.74,5118.85 3458.52,5121.63 3458.52,5131.81 3455.74,5134.59 3446.69,5134.59 3443.91,5137.38 3443.91,5147.56 3446.69,5150.34 3455.74,5150.34 3458.52,5153.13 3458.52,5163.31 3455.74,5166.09 3446.69,5166.09 3443.91,5168.87 3443.91,5179.05 3446.69,5181.84 3455.74,5181.84 3458.52,5184.62 3458.52,5194.8 3455.74,5197.59 3446.69,5197.59 3443.91,5200.37 3443.91,5210.55 3446.69,5213.33 3455.74,5213.33 3458.52,5216.12 3458.52,5226.3 3455.74,5229.08 3446.69,5229.08 3443.91,5231.87 3443.91,5242.05 3446.69,5244.83 3455.74,5244.83 3458.52,5247.61 3458.52,5257.79 3455.74,5260.58 3446.69,5260.58 3443.91,5263.36 3443.91,5273.54 3446.69,5276.33 3455.74,5276.33 3458.52,5279.11 3458.52,5310.49 3442.76,5326.26 3442.76,5376.76 3453.75,5387.76 3487.18,5387.76 3504.22,5404.8 v1(3519.22,5404.8)
$1N30085: R34.2 U2.25 | length 2337.5
  Top Layer w3.94: v1@3602.01,5397.01 3629.05,5397.01 3677.01,5444.97 R34.2@3677.01,5449.97 ; v1(3622.01,4412.01) 3627.01,4407.01 3658.83,4407.01 3661.61,4409.79 3661.61,4419.22 3664.39,4422.01 3674.58,4422.01 3677.36,4419.22 3677.36,4409.79 3680.14,4407.01 3690.32,4407.01 3693.11,4409.79 3693.11,4419.22 3695.89,4422.01 3706.07,4422.01 3708.86,4419.22 3708.86,4409.79 3711.64,4407.01 3721.82,4407.01 3724.6,4409.79 3724.6,4419.22 3727.39,4422.01 3737.57,4422.01 3740.35,4419.22 3740.35,4409.79 3743.14,4407.01 3753.32,4407.01 3756.1,4409.79 3756.1,4419.22 3758.88,4422.01 3769.06,4422.01 3771.85,4419.22 3771.85,4409.79 3774.63,4407.01 3784.81,4407.01 3787.6,4409.79 3787.6,4419.22 3790.38,4422.01 3800.56,4422.01 3803.34,4419.22 3803.34,4409.79 3806.13,4407.01 U2.25@4337.2,4407.01
  Bottom Layer w3.94: v1(3601.72,5397.3) 3522.01,5317.59 3522.01,5304.96 3524.79,5302.18 3539.22,5302.18 3542.01,5299.39 3542.01,5289.21 3539.22,5286.43 3524.79,5286.43 3522.01,5283.65 3522.01,5273.47 3524.79,5270.68 3538.82,5270.68 3541.6,5267.9 3541.6,5257.72 3538.82,5254.93 3524.79,5254.93 3522.01,5252.15 3522.01,5241.97 3524.79,5239.19 3539.17,5239.19 3541.95,5236.4 3541.95,5226.22 3539.17,5223.44 3524.79,5223.44 3522.01,5220.65 3522.01,5210.47 3524.79,5207.69 3538.82,5207.69 3541.6,5204.91 3541.6,5194.73 3538.82,5191.94 3524.79,5191.94 3522.01,5189.16 3522.01,5178.98 3524.79,5176.19 3540.58,5176.19 3543.37,5173.41 3543.37,5163.23 3540.58,5160.45 3524.79,5160.45 3522.01,5157.66 3522.01,5147.48 3524.79,5144.7 3541.64,5144.7 3544.42,5141.91 3544.42,5131.73 3541.64,5128.95 3524.79,5128.95 3522.01,5126.17 3522.01,5115.99 3524.79,5113.2 3543.41,5113.2 3546.19,5110.42 3546.19,5100.24 3543.41,5097.45 3524.79,5097.45 3522.01,5094.67 3522.01,5086.24 3524.79,5083.46 3543.66,5083.46 3546.45,5080.68 3546.45,5070.49 3543.66,5067.71 3524.79,5067.71 3522.01,5064.93 3522.01,5054.75 3524.79,5051.96 3543.66,5051.96 3546.45,5049.18 3546.45,5039 3543.66,5036.21 3524.79,5036.21 3509.88,5021.31 3509.88,4524.13 v1(3622.01,4412.01)
$1N30089: R32.2 U2.24 | length 2348
  Top Layer w3.94: v1(3562.01,5402.01) 3584.05,5402.01 R32.2@3632.01,5449.97 ; v1(3612.01,4387.01) 4257.01,4387.01 4287.01,4357.01 U2.24@4337.2,4357.01
  Bottom Layer w3.94: v1(3562.01,5402.01) 3539.88,5379.88 3500.47,5379.88 3477.01,5356.42 3477.01,5288.24 3479.79,5285.46 3499.22,5285.46 3502.01,5282.67 3502.01,5272.49 3499.22,5269.71 3479.79,5269.71 3477.01,5266.93 3477.01,5256.75 3479.79,5253.96 3499.22,5253.96 3502.01,5251.18 3502.01,5241 3499.22,5238.21 3479.79,5238.21 3477.01,5235.43 3477.01,5225.25 3479.79,5222.47 3499.22,5222.47 3502.01,5219.68 3502.01,5209.5 3499.22,5206.72 3479.79,5206.72 3477.01,5203.93 3477.01,5193.75 3479.79,5190.97 3499.22,5190.97 3502.01,5188.19 3502.01,5178.01 3499.22,5175.22 3479.79,5175.22 3477.01,5172.44 3477.01,5162.26 3479.79,5159.47 3499.22,5159.47 3502.01,5156.69 3502.01,5146.51 3499.22,5143.73 3479.79,5143.73 3477.01,5140.94 3477.01,5130.76 3479.79,5127.98 3499.22,5127.98 3502.01,5125.19 3502.01,5115.01 3499.22,5112.23 3479.79,5112.23 3477.01,5109.45 3477.01,5099.27 3479.79,5096.48 3499.22,5096.48 3502.01,5093.7 3502.01,5083.52 3499.22,5080.73 3479.79,5080.73 3477.01,5077.95 3477.01,5067.77 3479.79,5064.99 3499.22,5064.99 3502.01,5062.2 3502.01,5052.02 3499.22,5049.24 3479.79,5049.24 3477.01,5046.45 3477.01,5036.27 3479.79,5033.49 3499.22,5033.49 3502.01,5030.71 3502.01,5020.53 3499.22,5017.74 3479.79,5017.74 3477.01,5014.96 3477.01,4522.01 v1(3612.01,4387.01)